# Altium PCB PCB2.PcbDoc
Units mil, origin at the board's own origin, x right, y up, seen from the top; angles counter-clockwise.
Board outline 5620 x 2660 mil, 2 copper layers (Top Layer, Bottom Layer); 45 components, 34 nets, 168 pads, 12 vias.
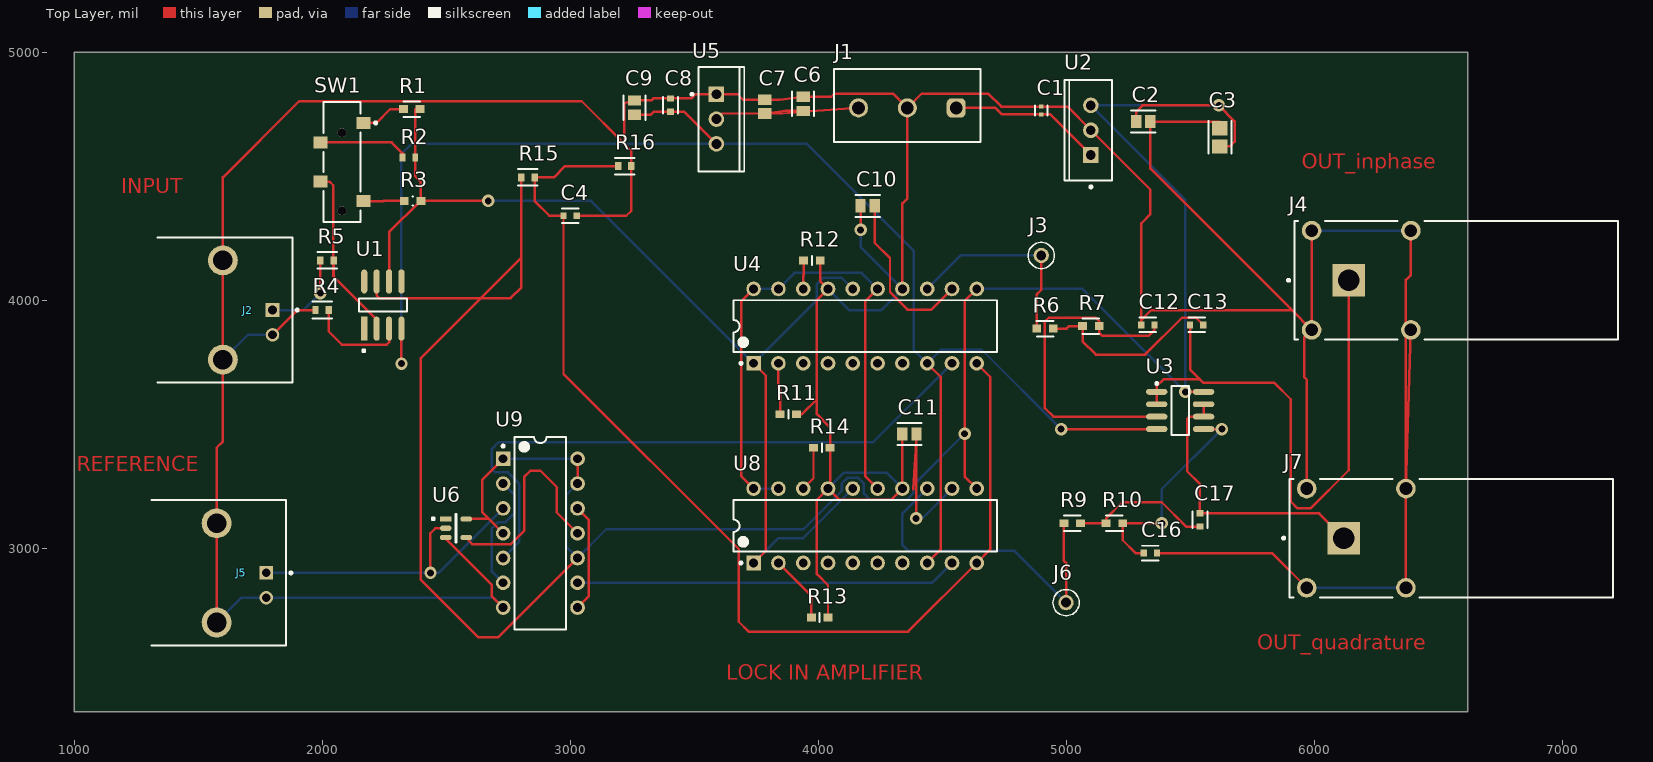
[diagram p0: Top Layer view]
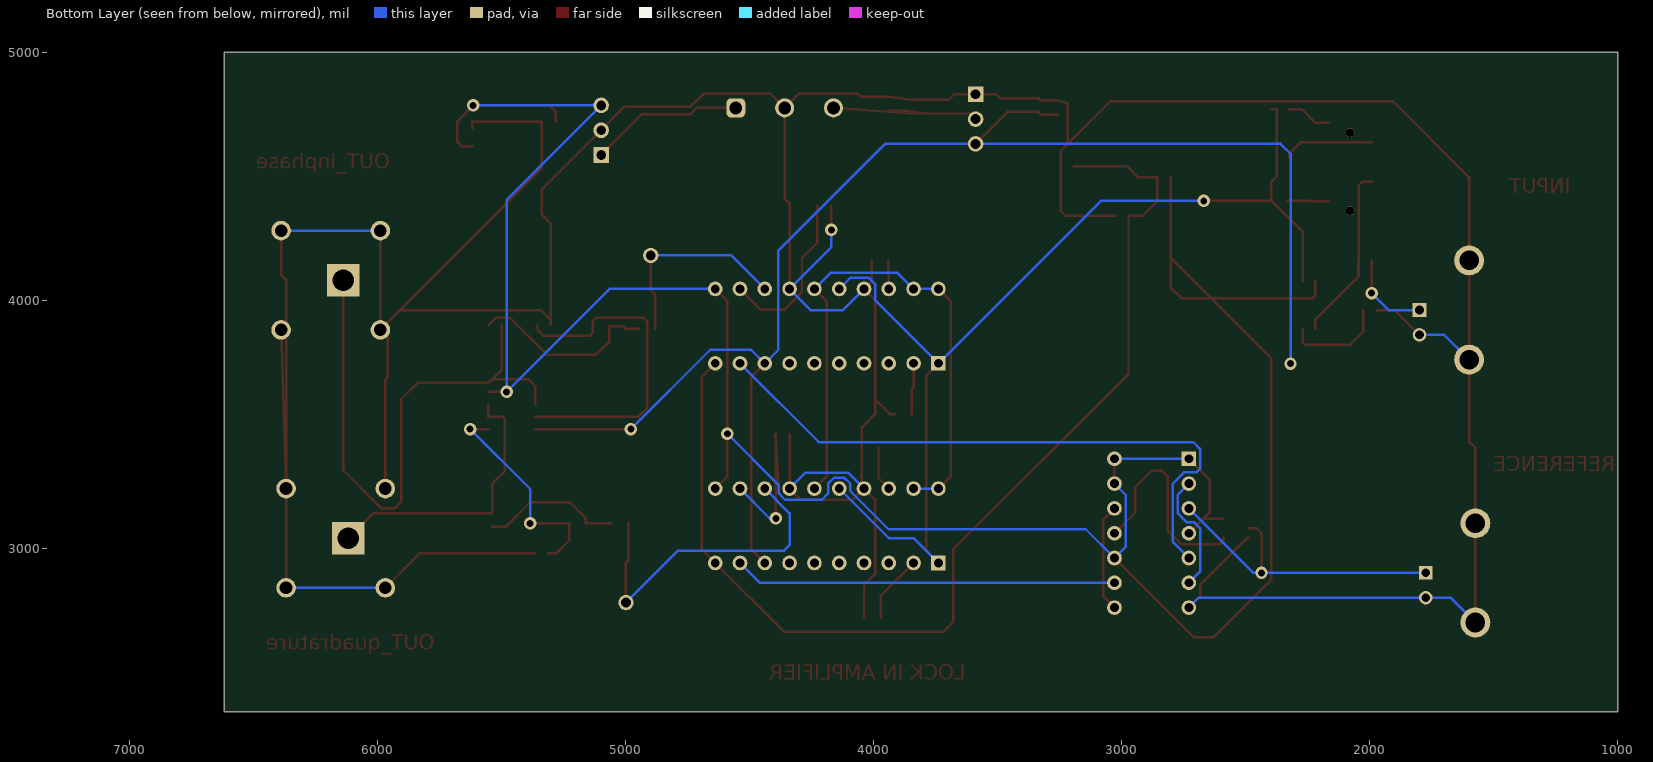
[diagram p1: Bottom Layer view, seen from below]
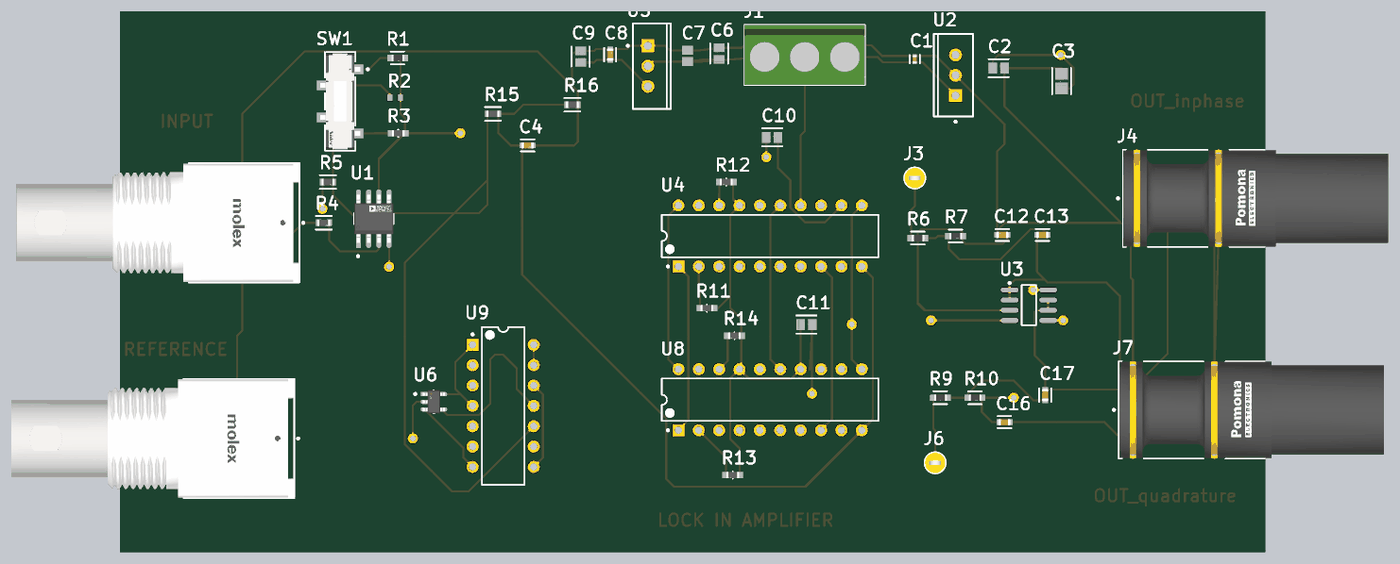
[diagram p2: 3D render of the assembled board from above, using the file's embedded part models]

## Layer stack, top to bottom
Top Solder: solder mask 0.4, Solder Resist, Dk 3.5
Top Layer: signal copper 1.4
Dielectric 1: dielectric 12.6, FR-4, Dk 4.8
Bottom Layer: signal copper 1.4
Bottom Solder: solder mask 0.4, Solder Resist, Dk 3.5

## Board outline
1000,2340 1000,5000 6620,5000 6620,2340

## Design rules (kind name [scope] priority, off if disabled: settings)
Clearance [All] p1: gap=10 ignorepadtopadclearanceinfootprint=FALSE
PolygonConnect [All] p1: connectstyle=Relief reliefconductorwidth=10 reliefentries=4 polygonreliefangle="90 Angle" airgapwidth=10
RoutingVias [All] p1: holewidth=28 width=50 viastyle="Through Hole" minholewidth=28 minwidth=50 maxholewidth=28 maxwidth=50
SolderMaskExpansion [All] p1: expansion=4 istentingtop=FALSE
SupplyNets "Schematic Supply Nets_2" [InNet('-Vs')] p1: voltage=0.000
SupplyNets "Schematic Supply Nets_1" [InNet('GND')] p2: voltage=0.000
SupplyNets "Schematic Supply Nets" [InNet('+Vs')] p3: voltage=0.000
Width [All] p1: maxlimit=10 minlimit=10 preferedwidth=10
30 further rules are at their usual default settings.

## Components (designator, comment, footprint, x,y, rotation, side; value= is the part's Value field where it differs from the comment)
C1 "330nF" FP-GRM155-0_1-MFG 4900,4764.25 r90 top
C2 "100nF" FP-CL21-IPC_C 5311.43,4720 r0 top
C3 "10uf" FP-CL21-IPC_A 5620,4656.45 r90 top
C4 "1uF" FP-GCM188-0_1-MFG 3000,4340 r0 top
C6 "100nF" FP-CL21-IPC_C 3940,4791.43 r90 top
C7 "2.2uF" CAPC2013X145X50LL20T25 3785,4780 r270 top
C8 "1uF" FP-GCM188-0_1-MFG 3405,4786.57 r90 top
C9 "100nF" FP-CL21-IPC_C 3260,4776.43 r90 top
C10 "100nF" FP-CL21-IPC_C 4200,4380 r180 top
C11 "100nF" FP-CL21-IPC_C 4368.57,3460 r180 top
C12 "1uF" FP-GCM188-0_1-MFG 5330,3900 r180 top
C13 "1uF" FP-GCM188-0_1-MFG 5526.57,3900 r180 top
C16 "1uF" FP-GCM188-0_1-MFG 5340,2980 r180 top
C17 "1uF" FP-GCM188-0_1-MFG 5540,3113.43 r90 top
J1 "691137710003" 691137710003 4360,4784.84 r180 top
J2 "73137-5003" FP-73137-5003-MFG 1185.43,3960 r270 top
J3 "5004" FP-5004-MFG 4900,4180 r0 top
J4 "73099-0" FP-73099-0-MFG 6573.07,4080 r0 top
J5 "73137-5003" FP-73137-5003-MFG 1160,2900 r270 top
J6 "5004" FP-5004-MFG 5000,2780 r0 top
J7 "73099-0" FP-73099-0-MFG 6553.07,3040 r0 top
R1 "16k" FP-RT0603-MFG 2361.54,4770 r0 top value=16KΩ
R2 "51k" RESC1608X55X25LL10T15 2350,4575 r0 top
R3 "100k" FP-RC0603-0_55-MFG 2365,4400 r0 top
R4 "1k" FP-AC0603-IPC_C 2000,3960 r0 top
R5 "1k" FP-AC0603-IPC_C 2020,4160 r0 top
R6 "16k" FP-RT0603-MFG 4915,3885 r0 top value=16KΩ
R7 "16k" FP-RT0603-MFG 5100,3895 r0 top value=16KΩ
R9 "16k" FP-RT0603-MFG 5025,3100 r0 top value=16KΩ
R10 "16k" FP-RT0603-MFG 5195,3100 r0 top value=16KΩ
R11 "100 ohm" FP-RC0603-0_55-MFG 3880,3540 r180 top
R12 "100 ohm" FP-RC0603-0_55-MFG 3975,4160 r180 top
R13 "100 ohm" FP-RC0603-0_55-MFG 4006.54,2720 r180 top
R14 "100 ohm" FP-RC0603-0_55-MFG 4015,3405 r180 top
R15 "10k" FP-RC0603-0_55-IPC_C 2830,4495 r0 top
R16 "10k" FP-RC0603-0_55-IPC_C 3220,4540 r0 top
SW1 "CL-SB-13B-02T" FP-CL-SB-13B-02T-MFG 2080,4556.89 r270 top
U1 "ADA4610-1ARZ" FP-R-8-IPC_A 2245,3980 r90 top
U2 "MC7805CTG" ONSC-TO-220-3-221AB-01 5100,4685 r180 top
U3 "ADA4610-2ARZ" ADI-R-8_N 5460,3555 r0 top
U4 "AD630JNZ" ADI-N-20 4190,3895 r90 top
U5 "LM7905CT/NOPB" NDE0003A 3590,4730 r270 top
U6 "SN74LVC1G04DBVT" FP-DBV0005A-IPC_C 2540,3080 r0 top
U8 "AD630JNZ" ADI-N-20 4190,3090 r90 top
U9 "SN74HC74N" N0014A 2880,3060 r0 top

## Footprints (in the part's own frame and the unit in brackets; to place one, negate y for a bottom-side part, rotate by r counter-clockwise, add the part's x,y. Pads: shape width x height; smd on the part's side, far side on the other; paste and mask are expansions set on the pad)
691137710003 [mm] "Horizontal Cable Entry with Pressure Clamp, pitch 5mm, 03p"
  rrect50% 1.95x1.95 hole 1.3: 1(-5,0.25)
  round 1.95 hole 1.3: 2(0,0.25) 3(5,0.25)
  silkscreen extent -7.5,-3.75 7.5,3.75, body extent -7.5,-3.75 7.5,3.75, height 11.6
ADI-N-20 [mm] "DIP, 20-Leads, Row Spacing 7.62mm, Pitch 2.54mm, Body 25.9x6.6mm"
  rect 1.5x1.5 hole 0.9: 1(-3.81,11.43)
  round 1.5 hole 0.9: 2(-3.81,8.89) 3(-3.81,6.35) 4(-3.81,3.81) 5(-3.81,1.27) 6(-3.81,-1.27) 7(-3.81,-3.81) 8(-3.81,-6.35) 9(-3.81,-8.89) 10(-3.81,-11.43) 11(3.81,-11.43) 12(3.81,-8.89) 13(3.81,-6.35) 14(3.81,-3.81) 15(3.81,-1.27) 16(3.81,1.27) 17(3.81,3.81) 18(3.81,6.35) 19(3.81,8.89) 20(3.81,11.43)
  silkscreen extent -3.93,-13.5 2.65,13.5, body extent -3.55,-13.45 3.55,13.45, height 5.33
ADI-R-8_N [mm] "SOIC, 8-Leads, Body 4.9x3.9mm, Pitch 1.27mm, IPC Medium Density"
  oval 2.2x0.6 smd: 1(-2.4,1.905) 2(-2.4,0.635) 3(-2.4,-0.635) 4(-2.4,-1.905) 5(2.4,-1.905) 6(2.4,-0.635) 7(2.4,0.635) 8(2.4,1.905)
  silkscreen extent -2.52,-2.5 0.9,2.88, body extent -2,-2.5 2,2.5, height 1.75
CAPC2013X145X50LL20T25 [mm] "Chip Capacitor, 2-Leads, Body 2.00x1.25mm, IPC High Density"
  rect 1.1x1.35 smd mask-2539.97: 1(-0.7,0) 2(0.7,0)
  body extent -1.1,-0.72 1.1,0.72, height 1.45
FP-5004-MFG [mm]
  round 1.57 hole 1.02 paste-2539.97 mask+0: 1(0,0)
  silkscreen extent -1.35,-1.34 1.35,1.34, body extent -1.45,-1.45 1.45,1.45, height 0.25
FP-73099-0-MFG [mm]
  rect 3.35x3.35 hole 2.2 paste-2539.97 mask+0: 1(-11,0)
  round 2 hole 1.3 paste-2539.97 mask+0: 2(-14.8,5.08) 3(-4.64,5.08) 4(-14.8,-5.08) 5(-4.64,-5.08)
  silkscreen extent -17.29,-6.06 16.56,6.06, body extent -16.66,-6.18 16.66,6.18, height 0.25
FP-73137-5003-MFG [mm]
  rect 1.39x1.39 hole 0.89 paste-2539.97 mask+0: 1(0,15.61)
  round 1.39 hole 0.89 paste-2539.97 mask+0: 2(2.54,15.61)
  round 3.06 hole 2.01 paste-2539.97 mask+0: 3(-5.08,10.53) 4(5.08,10.53)
  silkscreen extent -7.44,3.85 7.44,18.26, body extent -7.54,-17.75 7.54,17.75, height 0.25
FP-AC0603-IPC_C [mil]
  rect 25.93x31.97 smd paste+0 mask+0: 1(-26.64,0) 2(26.64,0)
  silkscreen extent -40,-33 40,33, body extent -44,-22 44,22, height 10
FP-CL21-IPC_A [mil]
  rect 57.27x61.27 smd paste+0 mask+0: 1(-36.45,0) 2(36.45,0)
  silkscreen extent -65,-46 65,46, body extent -85,-50 85,50, height 10
FP-CL21-IPC_C [mil]
  rect 41.52x53.39 smd paste+0 mask+0: 1(-28.57,0) 2(28.57,0)
  silkscreen extent -49,-44 49,44, body extent -53,-32 53,32, height 10
FP-CL-SB-13B-02T-MFG [mm]
  rect 1.2x1.4 smd paste+0 mask+0: 1(-4,2.2) 2(-2,-2.2) 3(2,-2.2) 4(4,2.2)
  round 0.9 hole 0.9 unplated paste-2539.97 mask+0: ""(-3,0) ""(5,0)
  silkscreen extent -6.15,-1.9 6.15,3.58, body extent -6,-2.5 6,2.5, height 6.1
FP-DBV0005A-IPC_C [mm]
  rect 1.205x0.532 smd paste+0 mask+0: 1(-1.05,0.95)
  rrect100% 1.205x0.532 smd paste+0 mask+0: 2(-1.05,0) 3(-1.05,-0.95) 4(1.05,-0.95) 5(1.05,0.95)
  silkscreen extent -2.45,-1.45 0.05,1.45, body extent -1.75,-1.55 1.75,1.55, height 0.25
FP-GCM188-0_1-MFG [mm]
  rect 0.65x0.7 smd paste+0 mask+0: 1(-0.675,0) 2(0.675,0)
  silkscreen extent -0.85,-0.75 0.85,0.75, body extent -1.1,-0.55 1.1,0.55, height 0.25
FP-GRM155-0_1-MFG [mm]
  rect 0.4x0.5 smd paste+0 mask+0: 1(-0.4,0) 2(0.4,0)
  silkscreen extent -0.53,-0.62 0.53,0.62, body extent -0.7,-0.4 0.7,0.4, height 0.25
FP-R-8-IPC_A [mil]
  rect 97.4x24.49 smd paste+0 mask+0: 1(-95.12,75)
  rrect100% 97.4x24.49 smd paste+0 mask+0: 2(-95.12,25) 3(-95.12,-25) 4(-95.12,-75) 5(95.12,-75) 6(95.12,-25) 7(95.12,25) 8(95.12,75)
  silkscreen extent -189,-96 27,96, body extent -164,-116 164,116, height 10
FP-RC0603-0_55-IPC_C [mil]
  rect 25.93x31.97 smd paste+0 mask+0: 1(-26.64,0) 2(26.64,0)
  silkscreen extent -40,-33 40,33, body extent -44,-22 44,22, height 10
FP-RC0603-0_55-MFG [mm]
  rect 0.9x0.8 smd paste+0 mask+0: 1(-0.85,0) 2(0.85,0)
  silkscreen extent -0.02,-0.45 0.02,0.45, body extent -1.4,-0.55 1.4,0.55, height 0.25
FP-RT0603-MFG [mm]
  rect 0.9x0.8 smd paste+0 mask+0: 1(-0.85,0) 2(0.85,0)
  silkscreen extent -0.85,-0.81 0.86,0.8, body extent -1.4,-0.55 1.4,0.55, height 0.25
N0014A [mm] "DIP, 14-Leads, Body 19.7x6.6mm, Pitch 2.54mm"
  rect 1.5x1.5 hole 0.9: 1(-3.81,7.62)
  round 1.5 hole 0.9: 2(-3.81,5.08) 3(-3.81,2.54) 4(-3.81,0) 5(-3.81,-2.54) 6(-3.81,-5.08) 7(-3.81,-7.62) 8(3.81,-7.62) 9(3.81,-5.08) 10(3.81,-2.54) 11(3.81,0) 12(3.81,2.54) 13(3.81,5.08) 14(3.81,7.62)
  silkscreen extent -3.93,-9.85 2.65,9.85, body extent -3.95,-9.85 3.95,9.85, height 5.08
NDE0003A [mm] "FM, 3-Leads, Body 10.7x4.7mm, Pitch 2.54mm"
  rect 1.6x1.6 hole 1: 1(-2.54,0)
  round 1.6 hole 1: 2(0,0) 3(2.54,0)
  silkscreen extent -5.35,-2.62 5.35,2.85, body extent -5.4,-1.9 5.4,2.9, height 19.4
ONSC-TO-220-3-221AB-01 [mm] "FM, 3-Leads, Body 10.3x4.85mm, Pitch 2.54mm"
  rect 1.6x1.6 hole 1: 1(0,2.54)
  round 1.6 hole 1: 2(0,0) 3(0,-2.54)
  silkscreen extent -2.19,-5.15 2.72,5.92, body extent -2.16,-5.15 2.69,5.15, height 19.68
RESC1608X55X25LL10T15 [mm] "Chip Resistor, 2-Leads, Body 1.60x0.80mm, IPC High Density"
  rect 0.6x0.8 smd: 1(-0.65,0) 2(0.65,0)
  body extent -0.85,-0.45 0.85,0.45, height 0.55

## Part data
C1: library part CMP-00260-135708718-1, "GRM155R61H334KE01J Multilayer Ceramic Capacitor, 0.33 uF, 50 V, ± 10%, X5R, 0402 [1005 Metric]", Case/Package=0402, Dielectric=X5R, Max Operating Temperature=85°C, Min Operating Temperature=-55°C, Tolerance=10%, Voltage Rating=50V, Capacitance=330nF, Height=600µm, Length=1mm, Lifecycle Status=Production, Material=Ceramic, NexarPartId=135708718, Thickness=500µm, Voltage Rating (DC)=50V, Width=500µm
C2 C6 C9 C10 C11: library part CMP-2000-05017-2, "CL21 Series 0805 100nF 50V ±10% Tolerance X7R Multilayer Ceramic Chip Capacitor", Case Code (Imperial)=0805, Case Code (Metric)=2012, Dielectric=X7R, Max Operating Temperature=125°C, Min Operating Temperature=-55°C, Tolerance=10%, Voltage=50V, Capacitance=100nF, Case/Package=0805, Contact Plating=Tin, Depth=1.25mm, Height=0.85mm, Lead Free="Lead Free", Length=2mm, Material=Ceramic, Mount="Surface Mount", Packaging="Tape and Reel", Radiation Hardening=No, Thickness=0.037inch, Voltage Rating=50V, Voltage Rating (DC)=50V, Width=0.049inch
C3: library part CMP-13271-002975-1, "CL21 Series 0805 10uF 25V ±10% Tolerance X5R Multilayer Ceramic Chip Capacitor", Capacitance=10uF, Case Code (Imperial)=0805, Case Code (Metric)=2012, Dielectric=X5R, Max Operating Temperature=85°C, Min Operating Temperature=-55°C, Package Quantity=1, Tolerance=10%, Voltage Rating=25V, Case/Package=0805, Depth=1.25mm, Height=1.25mm, Length=2mm, Mount="Surface Mount", Packaging="Tape and Reel", Radiation Hardening=No, Thickness=0.057inch, Width=0.049inch
C4 C8 C12 C13 C16 C17: library part CMP-2006-02363-4, Capacitance=1µF, Case Code (Imperial)=0603, Case Code (Metric)=1608, Dielectric=X7R, Manufacturer Lifecycle Status="IN PRODUCTION", Max Operating Temperature=125°C, Min Operating Temperature=-55°C, Ratings=AEC-Q200, Tolerance=10%, Voltage=25V, Case/Package=0603, Depth=800µm, Height=800µm, Lead Free="Lead Free", Length=1.6mm, Lifecycle Status=Production, Material=Ceramic, Mount="Surface Mount", NexarPartId=18909256, Packaging="Cut Tape", Radiation Hardening=No, REACH SVHC="No SVHC", RoHS=Compliant, Schedule B="8532240020, 8532240020", Termination=SMD/SMT, Thickness=889µm, Voltage Rating=25V, Voltage Rating (DC)=25V, Weight=6.293594mg, Width=787.4µm
C7: library part CMP-2007-01169-1, Manufacturer=Kemet, Part Number=C0805C225K4RAC7800
J1: library part CMP-1502-03325-3, "Terminal Block, 5MM Pitch, Horizontal, Pressure Clamp Glow Wire, Pcb, 3PINS, Gr", Lead Pitch=5mm, Number of Pins=3, Packaging=Box, RoHS=Non-Compliant
J2 J5: library part CMP-00257-00776508-1, "73137-5003 Connector BNC Female 0Hz To 2GHz 50 Ohm Solder Right Angle Through Hole Gold Tray", Dielectric Material=Polypropylene, Frequency=2GHz, Manufacturer Lifecycle Status=ACTIVE, Max Operating Temperature=70°C, Min Operating Temperature=-20°C, Voltage Rating=500V, Body Material="PBT, Polybutylene", Body Plating=Nickel, Connector Type=PCB, Contact Material="Bronze, Gold, Nickel, Tin", Contact Plating=Gold, Country of Origin=US, Depth=14.76mm, Gender=Female, Halogen Free="Low Halogen", Height=13.2mm, Impedance=50Ω, Insulation Material=Polyester, Lead Free="Lead Free", Length=35.18mm, Lifecycle Status=Production, Mount="Through Hole", NexarPartId=776508, Number of Contacts=1, Orientation="Right Angle, Straight", Plating=Nickel, Polarity=Normal, Radiation Hardening=No, REACH SVHC="No SVHC", RoHS=Compliant, Termination=Solder
J3 J6: library part CMP-2000-05575-2, "PC TEST POINT MINIATURE YELLOW", Manufacturer=Keystone, Automotive=No, Category=Conn, ComponentLink2Description=Datasheet, ComponentLink2URL=https://www.keyelco.com/product-pdf.cfm?p=1313, Contact Material=Silver, Device Class L1=Connectors, Device Class L2=unset, Device Class L3=unset, Digikey Description="PC TEST POINT MINIATURE YELLOW", Height=4.72mm, Is Female=yes, Lead Free=Yes, Manufacturer Part Number=5004, Mouser Description="TEST POINT PC MINI .040\"D YELLOW", Number of Contacts=1, Octopart=https://octopart.com/5004-keystone-28591, Package=5004, RoHS=TRUE
J4 J7: library part CMP-73906-000007-1, "R/A 4MM MOUNTG SAFE JACK/PCB BLK"
R1 R6 R7 R9 R10: library part CMP-2000-04660-2, "RES SMD 16K OHM 1% 1/10W 0603", Manufacturer=Yageo, Manufacturer Part Number=RT0603FRE0716KL, Package=RT0603, Power Rating=0.1W, Resistance=16KΩ, Temperature="-55°C to +155°C", Temperature Coefficient="50 ppm/°C", Temperature Range High=+155°C, Temperature Range Low=-55°C, Tolerance=0.01, Voltage Rating=75V, Automotive=No, Category=Res, ComponentLink2Description=Datasheet, ComponentLink2URL=http://www.yageo.com/documents/recent/PYu-RT_1-to-0.01_RoHS_L_9.pdf, Composition="Thin Film", Device Class L1="Passive Components", Device Class L2=Resistors, Device Class L3="Chip SMD Resistors", Digikey Description="RES SMD 16K OHM 1% 1/10W 0603", Footprint Url=http://www.yageo.com/exep/pages/download/literatures/PYu-R_Mount_10.pdf, Height=0.55mm, Ipc Land Pattern Name=RESC16080X45, Lead Free=Yes, Mouser Description="Thin Film Resistors - SMD 1/10W 16K ohm 1% 50ppm", Octopart=https://octopart.com/rt0603fre0716kl-yageo-1480398, RoHS=TRUE, Series=RT
R2: library part CMP-2000-04226-1, Manufacturer=Yageo, Part Number=RC0603FR-1351KL
R3: library part CMP-2100-03662-2, "RES SMD 100K OHM 1% 1/10W 0603", Case Code (Imperial)=0603, Case Code (Metric)=1608, Max Operating Temperature=155°C, Max Power Dissipation=100mW, Min Operating Temperature=-55°C, Resistance=100kR, Resistance Tolerance=1%, Resistor Type="Thick Film", Temperature Coefficient=100ppm/°C, Voltage Rating=50V, Working Voltage=75V, Case/Package=0603, Construction=Rectangular, Depth=0.8mm, Features="Moisture Resistant", Height=0.45mm, Lead Free="Lead Free", Length=1.6mm, Military Standard=Not, Number of Pins=2, Number of Terminations=2, Packaging="Tape and Reel", Power Rating=100mW, REACH SVHC="No SVHC", RoHS Compliant=Yes, Series=RC, Technology="THICK FILM", Termination=SMD/SMT, Tolerance=1%, Voltage Rating (DC)=50V, Width=0.8mm
R4 R5: library part CMP-03412-045511-1, "RES 1kΩ 1.00% 0.1W 0603", Case Code (Imperial)=0603, Case Code (Metric)=1608, Max Operating Temperature=155°C, Min Operating Temperature=-55°C, Power Rating=100mW, Resistance=1kR, Temperature Coefficient=100ppm/°C, Tolerance=1%, Voltage Rating=50V, Case/Package=0603, Height=0.45mm, Length=1.6mm, Packaging="Tape and Reel", RoHS Compliant=Yes, Series=AC, Termination=SMD/SMT, Width=0.8mm
R11 R12 R13 R14: library part CMP-2100-03663-2, Case Code (Imperial)=0603, Max Operating Temperature=155°C, Min Operating Temperature=-55°C, Power Rating=100mW, Resistance=100Ω, Temperature Coefficient=100ppm/°C, Tolerance=1%, Voltage Rating=50V, Case Code (Metric)=0603, Case/Package=0603, Composition="Thick Film", Depth=800µm, Height=450µm, Lead Free="Lead Free", Length=1.6mm, Military Standard=Not, NexarPartId=55402879, Number of Pins=2, Packaging="Tape & Reel", REACH SVHC=Unknown, RoHS=Compliant, Schedule B="8533210045, 8533210045", Termination=SMD/SMT, Voltage Rating (DC)=50V, Width=800µm
R15 R16: library part CMP-2100-03664-2, "RES 10K OHM 1% 1/10W 0603", Case Code (Imperial)=0603, Case Code (Metric)=1608, Max Operating Temperature=155°C, Max Power Dissipation=100mW, Min Operating Temperature=-55°C, Resistance=10kR, Resistance Tolerance=1%, Resistor Type="Thick Film", Temperature Coefficient=100ppm/°C, Voltage Rating=75V, Voltage Rating (DC)=50V, Case/Package=0603, Construction=Rectangular, Depth=0.8mm, Features="Moisture Resistant", Height=0.45mm, Lead Free="Lead Free", Lead Pitch=0.3mm, Length=1.6mm, Military Standard=Not, Number of Pins=2, Number of Terminations=2, Packaging="Tape and Reel", Power Rating=100mW, RoHS Compliant=Yes, Series=RC, Size Code=0603, Termination=SMD/SMT, Tolerance=1%, Weight=7.1E-05oz, Width=0.8mm
SW1: library part CMP-08360-77011255-1, "CL-SB-13B-02T Switch Slide ON-ON-ON SP3T Top 200mA 12VDC 10000Cycles Gullwing T/R", Contact Current Rating=200mA, Contact Resistance=70mΩ, Max Operating Temperature=85°C, Min Operating Temperature=-40°C, Voltage Rating (DC)=12V, Actuator Length=2mm, Actuator Material="Nylon, Polyamide", Contact Material=Copper, Contact Plating=Gold, Contact Style=Non-Shorting, Current Rating=200mA, Electrical Life=10kcycles, Height=6.1mm, Lead Free="Lead Free", Life (Cycles)=10kcycles, Mount="Surface Mount", NexarPartId=77011255, Orientation=Vertical, Packaging="Tape & Reel (TR)", RoHS=Compliant, Switch Function=On-On-On, Switch Travel=2mm, Termination="Gull Wing", Throw Configuration=SP3T
U1: library part CMP-09116-000135-1, "IC OPAMP JFET 1 CIRCUIT 8SOIC", Case/Package=SOIC, Input Bias Current=5pA, Input Offset Voltage (Vos)=400uV, Max Dual Supply Voltage=15V, Max Operating Temperature=125°C, Min Dual Supply Voltage=4.5V, Min Operating Temperature=-40°C, Operating Supply Current=1.6mA, Output Current per Channel=79mA, Power Supply Rejection Ratio (PSRR)=104dB, -3db Bandwidth=9.5MHz, Common Mode Rejection Ratio=100dB, Contact Plating=Tin, Gain Bandwidth Product=16.3MHz, Lead Free="Contains Lead", Max Supply Voltage=15V, Mount="Surface Mount", Number of Circuits=1, Number of Pins=8, Packaging=Rail/Tube, RoHS Compliant=Yes, Slew Rate=61V/µs, Voltage Gain=104dB
U2: library part CMP-2000-04928-1, "Positive Voltage Regulator, 1 A, 5 V, 0 to 125 degC, 3-Pin TO-220, RoHS, Tube", Current, Output, Maximum=1A, Current, Quiescent Supply=6.5mA, Current, Supply=3.2mA, Dropout Voltage=2V, Manufacturer="ON Semiconductor", Package Description="3-Pin Flange Mount, Vertical Straight Lead, Body 9.97 x 4.445 mm, Pitch 2.54 mm", Package Reference=TO-220-3-221AB-01, Package Type=TO-220, Package Version="Rev. A, 11/2010", Resistance, Thermal, Junction to Case=5degC/W, Temperature, Operating, Maximum=+125degC, Temperature, Operating, Minimum=0degC, Temperature, Operating, Range=0to+125degC, Voltage, Input Range=Maximumof35V, Voltage, Input, High Level=35V, Voltage, Noise=10μV/V, Voltage, Output=5V, Datasheet URL=http://www.onsemi.com/pub_link/Collateral/MC7800-D.PDF, Datasheet Version="Rev. 27, 11/2014", Dimensions=10.28x4.82x15.75mm, Dropout Voltage Measurement Current=1A, Height=15.75mm, Length=10.28mm, Line Regulation=20mV, Load Regulation=25mV, Manufacturer URL=http://www.onsemi.com/, Mounting Type=ThroughHole, Number of Outputs=1, Number of Pins=3, Output Type=Fixed, Polarity=Positive, Regulation, Line=0.5mV, Regulation, Load=1.3mV, Regulator Function=Standard, Regulator Type=PositiveVoltageOut, Type=VoltageRegulator, Voltage, Dropout=2V, Voltage, Supply=35V, Width=4.82mm
U3: library part CMP-0384-01191-1, "Double Channel Low Offset Voltage Drift Operational Amplifier, 10.6 MHz BW, 25 V/us SR, Industrial, 8-pin SOIC (R-8), Tube", Amplifiers Per Package=2, Generic Part Number=ADA4610-2, Input Bias Current=5pA, Input Offset Voltage=200uV, Manufacturer="Analog Devices", Code_JEDEC=MS-012-AA, ComponentLink1Description="Manufacturer URL", ComponentLink1URL=http://www.analog.com/en/index.html, ComponentLink2Description=Datasheet, ComponentLink2URL=http://www.analog.com/static/imported-files/data_sheets/ADA4610-2.pdf, ComponentLink3Description="Package Specification", ComponentLink3URL=http://www.analog.com/static/imported-files/packages/PKG_PDF/SOIC_Narrow%20(R)/R_8.pdf, DatasheetVersion="Rev. B", Iq/Amp=1.6mA, Mounting Technology="Surface Mount", PackageDescription="8-Pin Standard Small Outline Package, Body 3.9 x 4.9 mm, Pitch 1.27 mm", PackageReference=R-8, PackageVersion=060506-A, Packing=Tube, PartNumber=ADA4610-2ARZ, Slew Rate=25V/us, Small Signal Bandwidth=10.6MHz, V Span Max=30V, V Span Min=9V
U4 U8: library part CMP-0285-00007-1, "Balanced Modulator/Demodulator, 2MHz Max RF Frequency, N-20, 18 Tube", Max RF Frequency (MHz)=2MHz, Min RF Frequency (MHz)=0Hz, Code_JEDEC=MS-001, ComponentLink1Description="Manufacturer URL", ComponentLink1URL=www.analog.com, ComponentLink2Description=Datasheet, ComponentLink2URL=http://www.analog.com/static/imported-files/data_sheets/AD630.pdf, ComponentLink3Description="Package Specification", ComponentLink3URL=http://www.analog.com/static/imported-files/packages/50601349676519N_20.pdf, DatasheetVersion=RevE, PackageDescription="20-Lead Plastic Dual In-Line Package [PDIP]", PackageReference=N-20, PackageVersion=070706-A
U5: library part CMP-0062-02481-3, "3-Terminal Negative Regulator, 3-pin TO-220, Pb-Free", Manufacturer="Texas Instruments", PackageTopMarking=NSUZXYTTE#*LM7905CT, PowerWise=N, ComponentLink1Description="Datasheet URL", ComponentLink1URL=http://www.ti.com/general/docs/lit/getliterature.tsp?genericPartNumber=LM7905&fileType=pdf, CompType="LDO IC", PackageDescription="TO-220, Molded, 3 Lead, Straight", PackageReference=NDE0003A, PinCount=3, RoHS=Y
U6: library part CMP-0859-00133-4, "IC INVERTER 1CH 1-INP SOT23-5", Ambient Temperature Range High=+125°C, Ambient Temperature Range Low=-40°C, Manufacturer="Texas Instruments", Max Supply Voltage=5.5V, Min Supply Voltage=1.65V, Nominal Supply Current=10uA, Package=DBV0005A, Temperature="-40°C to +125°C", Automotive=No, Category=IC, ComponentLink2Description=Datasheet, ComponentLink2URL=http://www.ti.com/lit/ds/symlink/sn74lvc1g04.pdf, Device Class L1="Integrated Circuits (ICs)", Device Class L2="Logic ICs", Device Class L3="Logic Gates", Digikey Description="IC INVERTER 1CH 1-INP SOT23-5", Height=1.45mm, Ipc Land Pattern Name=SOT95P280X118-5, Lead Free=Yes, Logic Function Desc=Inverter, Manufacturer Part Number=SN74LVC1G04DBVT, Mouser Description="Inverters SINGLE INVERTER", Number of Circuits=1, Number Of Inputs=1, Number of Outputs=1, Octopart=https://octopart.com/sn74lvc1g04dbvt-texas+instruments-881539, Propagation Delay=3.7ns, RoHS=TRUE, Standoff Height=0mm, Temperature Range High=+125°C, Temperature Range Low=-40°C
U9: library part CMP-1616-00096-3, "Dual D-Type Positive-Edge-Triggered Flip-Flops With Clear and Preset, N0014A, TUBE", F @ Nom Voltage(Max)(Mhz)=28, Generic Part Number=SN74HC74, ICC @ Nom Voltage(Max)(mA)=0.04, Manufacturer="Texas Instruments", Operating Temperature Range(C)="-40 to 85", Rating=Catalog, tpd @ Nom Voltage(Max)(ns)=37, Voltage(Nom)(V)=3.3,5, 3-State Output=No, Bits(#)=2, Code_JEDEC=MS-001, DatasheetVersion=SCLS094D, Input Type=CMOS, Output=3S, Output Drive (IOL/IOH)(Max)(mA)=5.2/-5.2, Output Logic=Inverted,Non-inverted, Output Type=CMOS, PackageReference=N0014A, Schmitt Trigger=No, Technology Family=HC, VCC(Max)(V)=6, VCC(Min)(V)=2

## Via types
v1: diameter 50, hole 28, Top Layer to Bottom Layer, 12 vias

## Nets (pads, with @x,y where several pads share a name; then routed paths per layer and width w, separated by ;. In a path a pad name is that pad's centre, name@x,y a point inside that pad or via, vN(x,y) a via of type N, cw(c..) or ccw(c..) an arc to the next point about the centre after c; other vN are vias at no path point)
+Vs: C2.1 C3.1 R15.1 U1.7 U2.3 U3.8 U4.11 U6.5 U8.11 U9.1 U9.4 U9.10 U9.13 U9.14 | length 10910.3
  Top Layer w10: U1.7 2220,4018 2230,4008 2640,4008 ; U6.5@2591.18,3117.4 2672.6,3117.4 ; U9.4 2672.6,3117.4 ; U9.1 2646,3276 2646,3144 2672.6,3117.4 ; R15.1 2803.36,4171.36 ; U9.10 2710,2640 2630,2640 2397,2873 2397,3765 2640,4008 ; U9.13 U9.14 ; U8.11 4591,3289 v1(4591,3461) 4591,3996 U4.11 ; C2.1 5282.85,4760 5307.7,4784.85 v1@5616,4784.85 ; v1(5481,3630) U3.8 ; v1(5616,4785) v1@5616,4784.85 ; C3.1 5661,4620 5680,4639 5680,4720.85 v1@5616,4784.85 ; 2640,4008 2803.36,4171.36 ; 2640,4008 2760,4008 2803.36,4051.36 2803.36,4171.36
  Bottom Layer w10: U9.1 U9.14 ; U9.13 2985,3215 2985,3005 U9.10 3146,3076 3940.53,3076 4095.47,3230.94 4095.47,3260 4120,3284.53 4160,3284.53 4184.53,3260 4184.53,3220 4209.53,3195 4357.97,3195 4384.53,3221.56 4384.53,3254.53 v1(4591,3461) ; U4.11 5066,4045 v1(5481,3630) 5481,4404 U2.3 v1(5616,4785)
-Vs: C8.1 C9.1 U1.4 U3.4 U4.8 U5.3 U8.8 | length 6043.8
  Top Layer w10: v1(2320,3744) U1.4 ; C9.1 3326,4747.85 3338.15,4760 C8.1 3460,4760 U5.3 ; U8.8 4494,2994 4494,3691 U4.8 ; v1(4980,3480) U3.4
  Bottom Layer w10: v1(2320,3744) 2320,4590 2360,4630 U5.3 3955,4630 4385,4200 4385,3800 U4.8 4495,3800 4660,3800 v1(4980,3480)
clk: J5.1 U6.2 U9.3 | length 1283.2
  Top Layer w10: v1(2437,2900) 2437,3060 2457,3080 U6.2@2488.82,3080
  Bottom Layer w10: J5.1 v1(2437,2900) 2470,2900 U9.3
GND: C1.2 C2.2 C3.2 C4.2 C6.2 C7.1 C8.2 C9.2 C10.2 C11.2 C12.2 C16.1 J1.2 J2.2 J2.3 J2.4 J4.2 J4.3 J4.4 J4.5 J5.2 J5.3 J5.4 J7.2 J7.3 J7.4 J7.5 R4.1 R11.1 R12.1 R13.1 R14.1 R16.2 U2.2 U4.14 U4.17 U5.1 U6.3 U8.14 U8.17 U9.7 | length 19981.2
  Top Layer w10: J5.4 J5.3 1574.57,3404.57 1600,3430 J2.4 J2.3 1600,4495 1907,4802 3047,4802 3218,4631 ; J2.2 1900,3960 R4.1 ; U6.3@2488.82,3042.6 2493,3042.6 2685,2850.6 2685,2805 U9.7 ; C4.2 3226.64,4340 3246.64,4360 R16.2 3246.64,4602.36 3218,4631 ; R11.1 3935,3540 3995,3600 ; R12.1 4008.46,4076.54 U4.17 3995,4000 3995,3600 ; R13.1 4040,2850 3995,2895 3995,3195 U8.17 ; v1(4171.43,4283) C10.2 ; C11.2 U8.14 4294,3194 4086,3194 U8.17 ; U4.14 4340,4390 4360,4410 J1.2 ; C12.2 5303.43,3920 ; C16.1 5830.39,2980 J7.4 ; C3.2 5620,4720 C2.2 5340,4530.39 5910.39,3960 ; J7.2 5970.39,3679.61 5960,3690 5960,3849.61 J4.4 ; J4.2 J4.4 ; J7.5 J7.3 ; J4.5 J7.3 ; J4.3 6390.39,4101.39 6370.39,4081.39 J7.3 ; 3218,4631 3218,4793 C9.2 3328,4805 3336.15,4813.15 C8.2 3489,4813.15 3505.85,4830 U5.1 3676,4830 3698.44,4807.56 C7.1 3846,4807.56 C6.2 4053,4820 4066,4833 4302,4833 J1.2 ; 3995,3600 3995,3540 4048.46,3486.54 R14.1 4048.46,3248.46 U8.17 ; J1.2 4418,4833 4686,4833 4739,4780 C1.2 5005,4780 U2.2 5340,4445 5340,4346.57 5303.43,4310 5303.43,3920 ; 5303.43,3920 5343.43,3960 5910.39,3960 ; 5910.39,3960 J4.4
  Bottom Layer w10: J5.4 1674.57,2800 J5.2 2690,2800 U9.7 ; J2.4 1700,3860 J2.2 ; U8.17 4104.53,3304.53 4275.47,3304.53 U8.14 ; U4.17 4125,3960 4255,3960 U4.14 4171.43,4213.57 v1(4171.43,4283) ; J7.4 J7.5 ; J4.2 J4.3
inphase_before_LPF: J3.1 R6.1 U4.13 | length 818.6
  Top Layer w10: R6.1 4881.54,4023 4900,4041.46 J3.1
  Bottom Layer w10: U4.13 4575,4180 J3.1
inphase_out: C13.2 J4.1 U3.1 U3.2 | length 2381.5
  Top Layer w10: U3.2 U3.1 5365.51,3652.51 5393,3680 5540,3680 ; C13.2 5500,3720 5540,3680 ; J4.1 6140,3314 5986,3160 5934,3160 5906,3188 5906,3600 5840,3666 5554,3666 5540,3680
NetC1_1: C1.1 J1.1 U2.1 | length 621.9
  Top Layer w10: J1.1 4715,4775 4741.5,4748.5 C1.1 4936.5,4748.5 U2.1
NetC6_1: C6.1 C7.2 J1.3 U5.2 | length 738.9
  Top Layer w10: U5.2 3612.44,4752.44 C7.2 ; C6.1 3870.56,4762.85 C7.2 ; J1.3 3940.31,4758.58 3857,4752.44 C7.2
NetC10_1: C10.1 U4.12 | length 686.8
  Top Layer w10: C10.1 4228.57,4230.43 4290,4169 4290,4032 4360,3962 4457,3962 U4.12
NetC11_1: C11.1 U8.12 | length 1516.3
  Top Layer w10: 4384.45,3237.44 4384.46,3237.59 ; 4384.53,3240 cw(c4339.97,3240) 4384.47,3237.75 ; v1(4395.31,3120) 4395.31,3426.21 ; 4384.46,3237.51 ccw(c4339.97,3240) 4384.46,3237.59 ; 4384.46,3237.51 4395.31,3426.21 ; 4384.46,3237.49 4384.46,3237.59 ; 4384.46,3237.6 ccw(c4339.97,3240) 4384.47,3237.68 ; 4384.46,3237.6 4395.31,3426.21 ; 4384.46,3237.59 4395.31,3426.21 ; 4384.47,3237.68 ccw(c4339.97,3240) 4384.47,3237.75 ; 4384.47,3237.68 4395.31,3426.21 ; 4384.47,3237.75 4395.31,3426.21 ; 4395.31,3426.21 C11.1 4395.31,3458.16 4395.31,3426.21
  Bottom Layer w10: v1(4395.31,3120) 4420,3120 U8.12
NetC12_1: C12.1 R7.2 U3.3 | length 1349.2
  Top Layer w10: C12.1 5356.57,3880 5332.57,3856 5147.46,3856 5133.46,3870 R7.2 5133.46,3915.54 5120,3929 4930,3929 4915,3914 4915,3564 4949,3530 U3.3
NetC13_1: C13.1 R6.2 R7.1 | length 766.2
  Top Layer w10: R6.2 5002,3885 5012,3895 R7.1 5066.54,3833.46 5120,3780 5319,3780 5468,3929 5524.15,3929 C13.1
NetC16_2: C16.2 R10.2 U3.5 | length 886.1
  Top Layer w10: C16.2 5280,2980 5228.46,3031.54 R10.2 v1(5386,3100) ; U3.5 v1(5628,3480)
  Bottom Layer w10: v1(5386,3100) 5386,3238 v1(5628,3480)
NetC17_1: C17.1 R9.2 R10.1 | length 569.1
  Top Layer w10: R9.2 R10.1 5161.54,3120 5226.54,3185 5386,3185 5484.15,3086.85 C17.1
NetJ2_1: J2.1 R5.1 | length 353.3
  Top Layer w10: v1(1993,4028) 1993.36,4028.36 R5.1
  Bottom Layer w10: J2.1 1925,3960 v1(1993,4028)
NetR1_1: R1.1 SW1.1 | length 184.5
  Top Layer w10: SW1.1 2219,4714.37 2274.63,4770 R1.1
NetR2_1: R2.1 SW1.2 | length 365.6
  Top Layer w10: SW1.2 2280,4635.63 2324.41,4591.22 R2.1
NetR3_1: R3.1 SW1.4 | length 165.2
  Top Layer w10: SW1.4 2248,4399.41 2248.59,4400 R3.1
NetR4_2: R4.2 U1.3 | length 411.1
  Top Layer w10: R4.2 2026.64,3873.36 2080,3820 2260,3820 2270,3830 U1.3
NetR5_2: R5.2 SW1.3 U1.2 | length 773.9
  Top Layer w10: SW1.3 2030,4478.15 2045,4463.15 2045,4096.34 2046.64,4094.69 ; R5.2 2046.64,4094.69 ; U1.2 2220,3921.34 2046.64,4094.69
NetR11_2: R11.2 U4.2 | length 207.7
  Top Layer w10: U4.2 3840,3645.53 3846.53,3639 R11.2
NetR12_2: R12.2 U4.18 | length 115.6
  Top Layer w10: U4.18 3940,4101 3941.54,4102.54 R12.2
NetR13_2: R13.2 U8.2 | length 275.1
  Top Layer w10: U8.2 3973.07,2806.93 R13.2
NetR14_2: R14.2 U8.18 | length 182.2
  Top Layer w10: U8.18 3981.54,3281.54 R14.2
NetU9_2: U9.2 U9.6 | length 491.7
  Bottom Layer w10: U9.6 2685,2905 2685,3080 2710,3105 2740,3105 2774.53,3139.53 2774.53,3215.47 U9.2
NetU9_8: U9.8 U9.12 | length 437.3
  Top Layer w10: U9.8 3075,2805 3075,3115 U9.12
notclk: U6.4 U9.11 | length 871.9
  Top Layer w10: U6.4@2591.18,3042.6 2591.18,3030 2606.18,3015 2760,3015 2816,3071 2816,3288 2840,3312 2880,3312 2946,3246 2946,3144 U9.11
outclk1: U4.9 U9.5 | length 2539.3
  Bottom Layer w10: U9.5 2794.53,3024.53 2794.53,3260.47 2750,3305 2700,3305 2685,3320 2685,3400 2712,3427 4222,3427 U4.9
outclk2: U8.9 U9.9 | length 1543.1
  Bottom Layer w10: U9.9 4460,2860 U8.9
quadphase_before_LPF: J6.1 R9.1 U8.13 | length 1349
  Top Layer w10: R9.1 4991.54,2948.46 5000,2940 J6.1
  Bottom Layer w10: U8.13 4340,3140 4340,3012 4362,2990 4790,2990 J6.1
quadrature_out: C17.2 J7.1 U3.6 U3.7 | length 1143.6
  Top Layer w10: U3.7 U3.6 5498,3530 5488,3520 5488,3310 5540,3258 C17.2 6020,3140 J7.1
ra: R1.2 R2.2 R3.2 U1.6 U4.1 U4.16 U8.1 U8.16 | length 4360.1
  Top Layer w10: U1.6 2270,4274 2396,4400 R3.2 ; R1.2 2375.59,4770 R2.2 2375.59,4498.87 2398.46,4476 R3.2 ; v1(2670,4400) R3.2 ; U8.1 3789,2989 3789,3696 U4.1
  Bottom Layer w10: v1(2670,4400) 3085,4400 U4.1 3995,4000 3995,4064.53 4020,4089.53 4095.47,4089.53 U4.16 ; U8.1 3840,3040 3940,3040 U8.16
ref: C4.1 R15.2 R16.1 U4.10 U8.10 | length 4462.7
  Top Layer w10: R16.1 2980,4540 2935,4495 R15.2 2856.64,4400 2916.64,4340 C4.1 2973.43,3702.57 3680,2996 3680,2703 3720,2663 4363,2663 U8.10 4694,2994 4694,3691 U4.10
rf: U4.15 U4.19 U4.20 U8.15 U8.19 U8.20 | length 2344.6
  Top Layer w10: U8.20 3691,3289 3691,3996 U4.20 ; U8.15 4191,3289 4191,3996 U4.15
  Bottom Layer w10: U8.20 U8.19 ; U4.20 U4.19 3904.53,4109.53 4175.47,4109.53 U4.15
pads on no net: SW1. U1.1 U1.5 U1.8 U4.3 U4.4 U4.5 U4.6 U4.7 U6.1 U8.3 U8.4 U8.5 U8.6 U8.7

## Other copper
Top Layer:
  text "OUT_inphase" at 5950,4529.99 h60
  text "INPUT" at 1190,4430 h60
  text "REFERENCE" at 1010,3310 h60
  text "OUT_quadrature" at 5770,2589.99 h60
  text "LOCK IN AMPLIFIER" at 3630,2470 h60